# Altium PCB PDM.PcbDoc (part 3 of 4)
Units mm, origin at the board's own origin, x right, y up, seen from the top; angles counter-clockwise.
Board outline 150 x 150 mm, 2 copper layers (Top Layer, Bottom Layer), stack 1.58 mm thick; 183 components, 85 nets, 477 pads, 0 vias.
Unrouted connection lines stored in the file: 318.
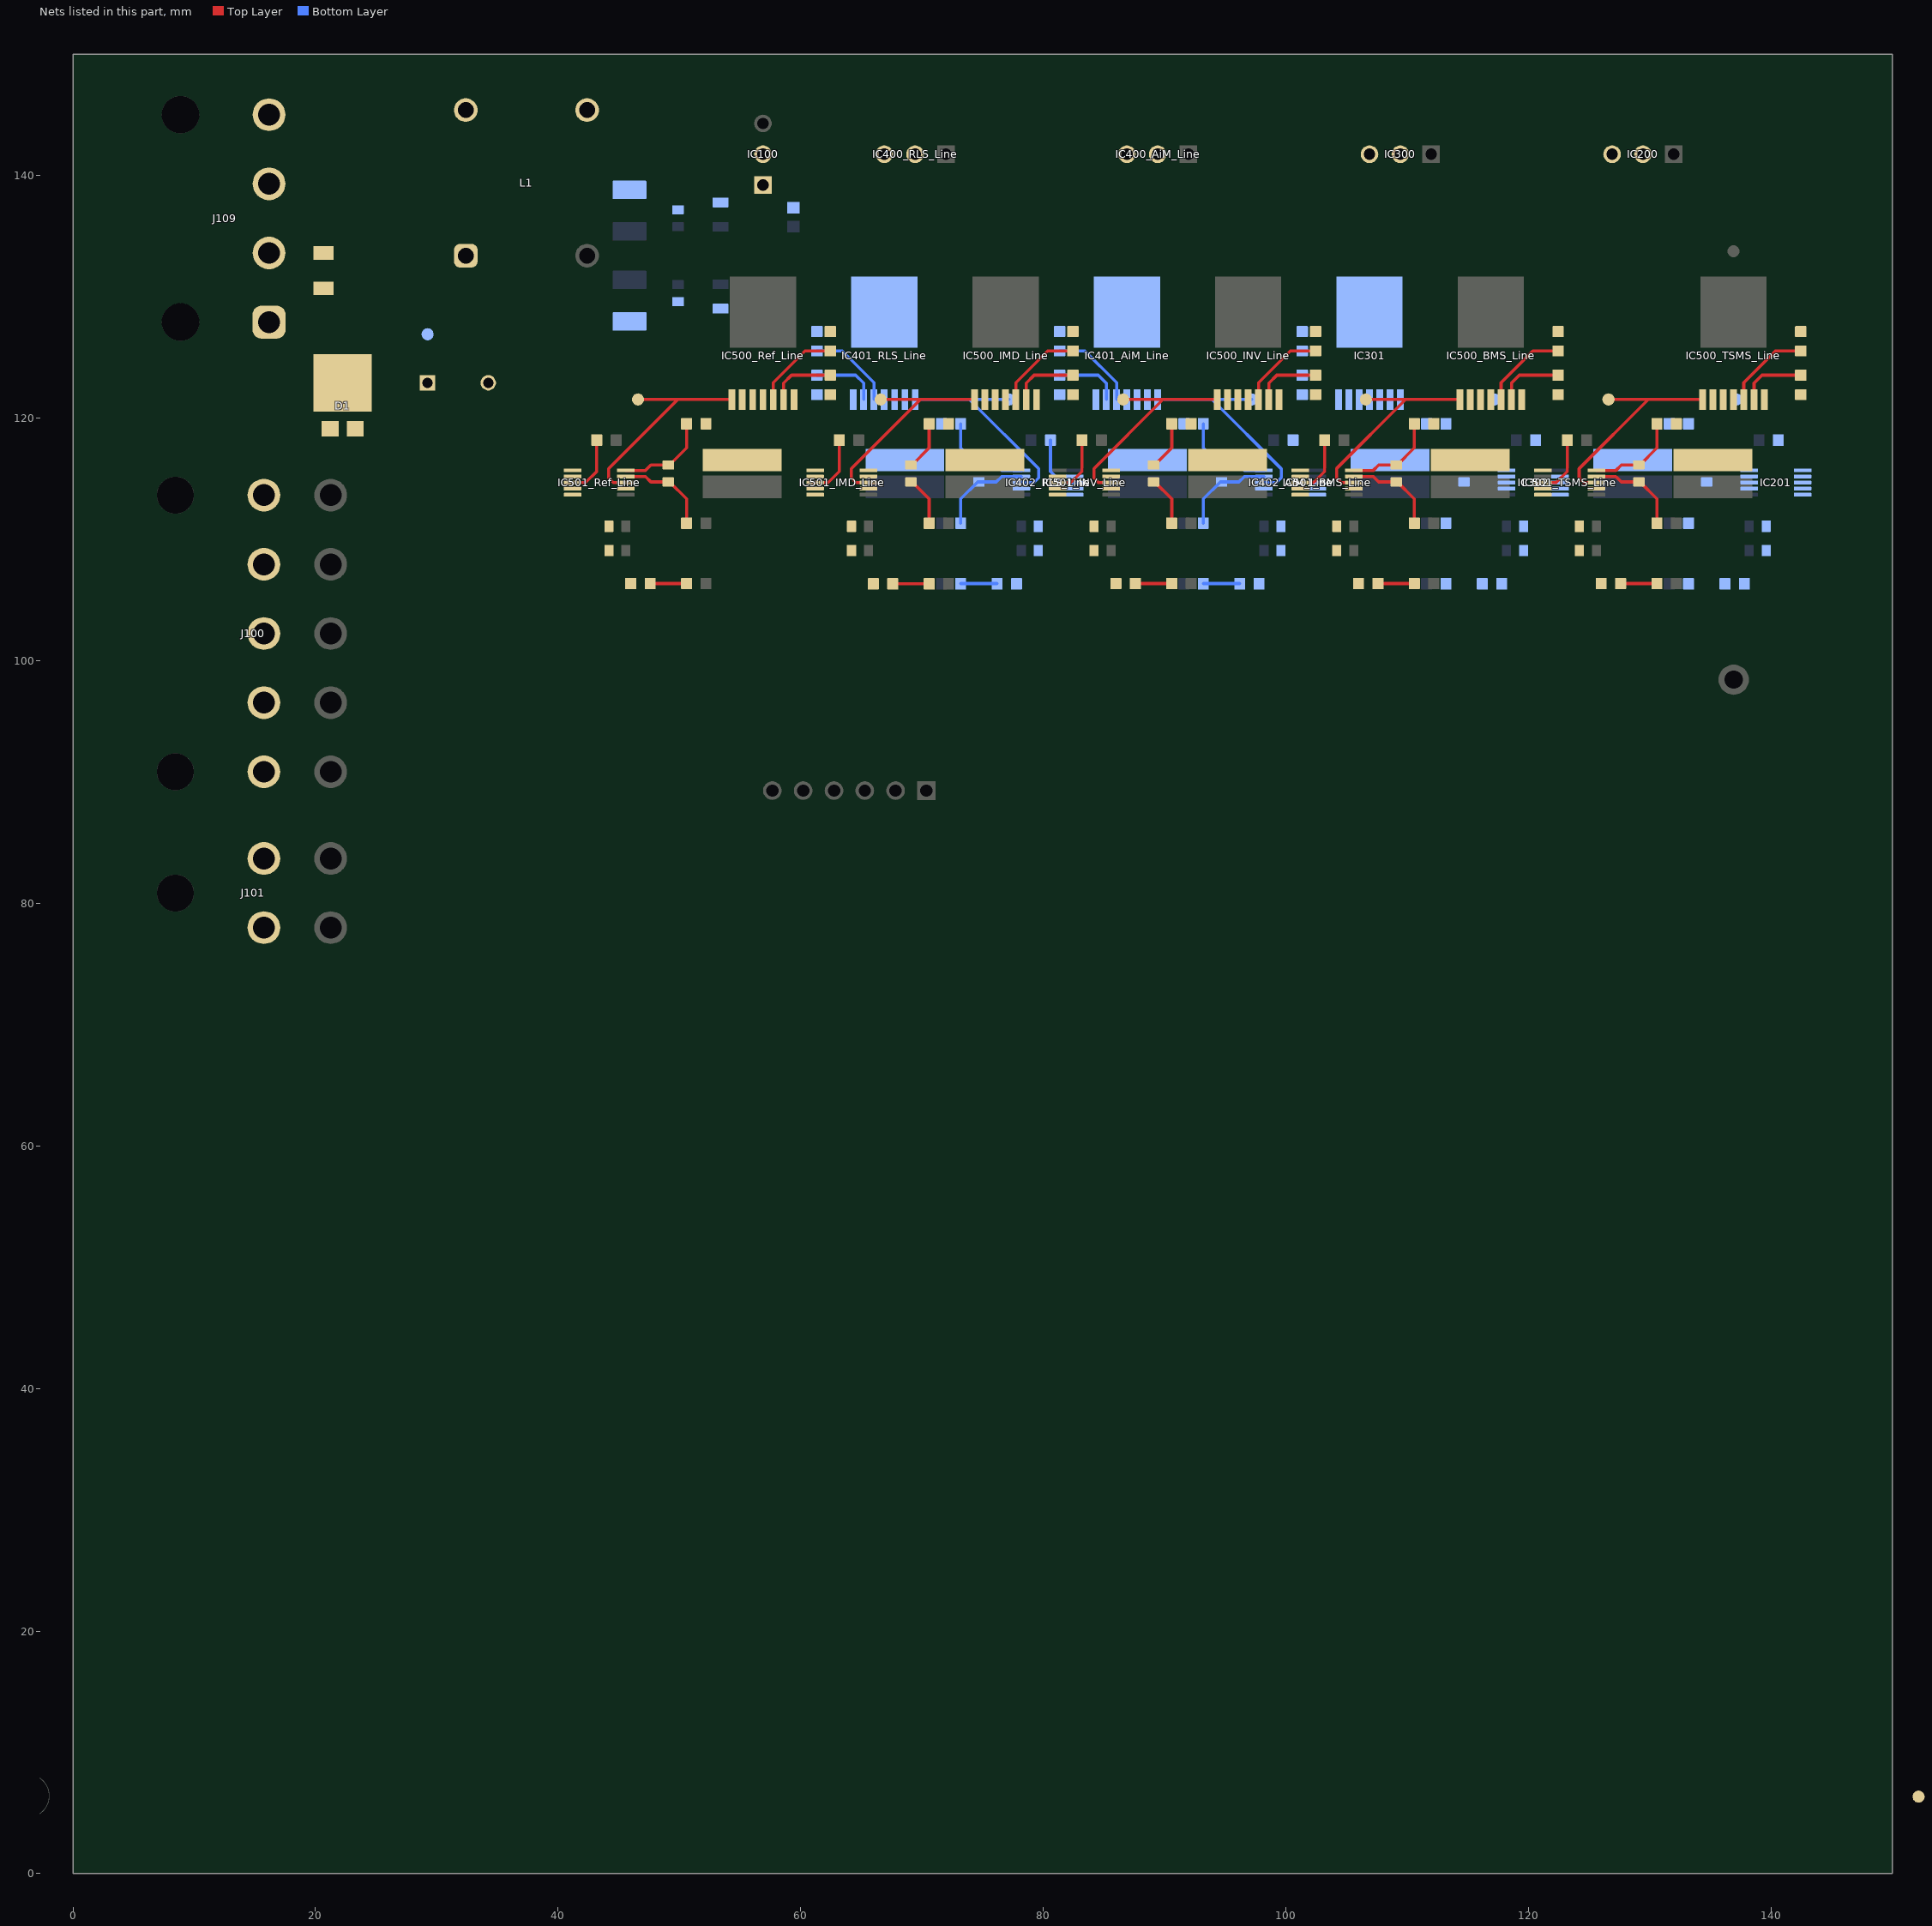
[diagram p2: the nets of this part, all layers, seen from the top]

## Nets (pads, with @x,y where several pads share a name; then routed paths per layer and width w, separated by ;. In a path a pad name is that pad's centre, name@x,y a point inside that pad or via, vN(x,y) a via of type N, cw(c..) or ccw(c..) an arc to the next point about the centre after c; other vN are vias at no path point) (continued)
GND: C1.2 C2.2 C3.2 C4.2 C5.2 C6.2 C201.1 C202.1 C301.1 C302.1 C401_AiM_Line.1 C401_RLS_Line.1 C402_AiM_Line.1 C402_RLS_Line.1 C501_BMS_Line.1 C501_IMD_Line.1 C501_INV_Line.1 C501_Ref_Line.1 C501_TSMS_Line.1 C502_BMS_Line.1 C502_IMD_Line.1 C502_INV_Line.1 C502_Ref_Line.1 C502_TSMS_Line.1 IC100.2 IC200.2 IC201.2 IC201.7 IC300.2 IC301.7 IC302.7 IC400_AiM_Line.2 IC400_RLS_Line.2 IC401_AiM_Line.7 IC401_RLS_Line.7 IC402_AiM_Line.7 IC402_RLS_Line.7 IC500_BMS_Line.7 IC500_IMD_Line.7 IC500_INV_Line.7 IC500_Ref_Line.7 IC500_TSMS_Line.7 IC501_BMS_Line.1 IC501_BMS_Line.7 IC501_IMD_Line.1 IC501_IMD_Line.7 IC501_INV_Line.2 IC501_INV_Line.7 IC501_Ref_Line.1 IC501_Ref_Line.2 IC501_Ref_Line.7 IC501_TSMS_Line.1 IC501_TSMS_Line.7 J100.1 J100.2 J100.3 J100.4 J100.5 J101.1 J101.2 J109.3 J109.4 J116.1 J116.4 L1.3 L100.C L200.C L300.C L400_AiM_Line.C L400_RLS_Line.C L500_BMS_Line.C L500_IMD_Line.C L500_INV_Line.C L500_Ref_Line.C L500_TSMS_Line.C R300.2 R301.2 R400_AiM_Line.2 R400_RLS_Line.2 R402_AiM_Line.2 R402_RLS_Line.2 R500_BMS_Line.2 R500_IMD_Line.2 R500_INV_Line.2 R500_Ref_Line.2 R500_TSMS_Line.2 R501_BMS_Line.2 R501_IMD_Line.2 R501_INV_Line.2 R501_Ref_Line.2 R501_TSMS_Line.2 TP102.1 TP103.1
IN+: F1.1 J109.2 TP115.1
IN-: C7.N D1.1 D1.2 J109.1 L1.4 TP116.1
NetC7_P: C7.P D1.3 F1.2 L1.1 TP1.1
NetC200_1: C200.1 IC201.10 R202.1
NetC200_2: C200.2 IC201.9 R203.1
NetC300_1: C300.1 IC302.10 R304.1
NetC300_2: C300.2 IC302.9 R305.1
NetC400_AiM_Line_1: C400_AiM_Line.1 IC402_AiM_Line.10 R403_AiM_Line.1 | length 7.7
  Bottom Layer w0.254: R403_AiM_Line.1@93.185,119.526 93.185,117.531 C400_AiM_Line.1@94.59,116.126 ; C400_AiM_Line.1@94.685,116.126 96.121,116.126 96.571,115.676 IC402_AiM_Line.10@98.185,115.676
NetC400_AiM_Line_2: C400_AiM_Line.2 IC402_AiM_Line.9 R404_AiM_Line.1 | length 7.7
  Bottom Layer w0.254: R404_AiM_Line.1@93.185,111.326 93.185,113.321 C400_AiM_Line.2@94.59,114.726 ; C400_AiM_Line.2@94.685,114.726 96.121,114.726 96.571,115.176 IC402_AiM_Line.9@98.185,115.176
NetC400_RLS_Line_1: C400_RLS_Line.1 IC402_RLS_Line.10 R403_RLS_Line.1 | length 7.8
  Bottom Layer w0.254: R403_RLS_Line.1@73.185,119.526 73.185,117.531 74.59,116.126 C400_RLS_Line.1@74.685,116.126 76.121,116.126 76.571,115.676 IC402_RLS_Line.10@78.185,115.676
NetC400_RLS_Line_2: C400_RLS_Line.2 IC402_RLS_Line.9 R404_RLS_Line.1 | length 7.8
  Bottom Layer w0.254: R404_RLS_Line.1@73.185,111.326 73.185,113.321 74.59,114.726 C400_RLS_Line.2@74.685,114.726 76.121,114.726 76.571,115.176 IC402_RLS_Line.9@78.185,115.176
NetC500_BMS_Line_1: C500_BMS_Line.1 IC501_BMS_Line.10 R504_BMS_Line.1 | length 7.7
  Top Layer w0.254: IC501_BMS_Line.10@105.585,115.676 107.198,115.676 107.648,116.126 C500_BMS_Line.1@109.085,116.126 ; C500_BMS_Line.1@109.18,116.126 110.585,117.531 R504_BMS_Line.1@110.585,119.526
NetC500_BMS_Line_2: C500_BMS_Line.2 IC501_BMS_Line.9 R505_BMS_Line.1 | length 7.7
  Top Layer w0.254: IC501_BMS_Line.9@105.585,115.176 107.198,115.176 107.648,114.726 C500_BMS_Line.2@109.085,114.726 ; C500_BMS_Line.2@109.18,114.726 110.585,113.321 R505_BMS_Line.1@110.585,111.326
NetC500_IMD_Line_1: C500_IMD_Line.1 IC501_IMD_Line.10 R504_IMD_Line.1 | length 4
  Top Layer w0.254: C500_IMD_Line.1@69.18,116.126 70.585,117.531 R504_IMD_Line.1@70.585,119.526
NetC500_IMD_Line_2: C500_IMD_Line.2 IC501_IMD_Line.9 R505_IMD_Line.1 | length 4
  Top Layer w0.254: C500_IMD_Line.2@69.18,114.726 70.585,113.321 R505_IMD_Line.1@70.585,111.326
NetC500_INV_Line_1: C500_INV_Line.1 IC501_INV_Line.10 R504_INV_Line.1 | length 4
  Top Layer w0.254: C500_INV_Line.1@89.18,116.126 90.585,117.531 R504_INV_Line.1@90.585,119.526
NetC500_INV_Line_2: C500_INV_Line.2 IC501_INV_Line.9 R505_INV_Line.1 | length 4
  Top Layer w0.254: C500_INV_Line.2@89.18,114.726 90.585,113.321 R505_INV_Line.1@90.585,111.326
NetC500_Ref_Line_1: C500_Ref_Line.1 IC501_Ref_Line.10 R504_Ref_Line.1 | length 7.8
  Top Layer w0.254: IC501_Ref_Line.10@45.585,115.676 47.198,115.676 47.648,116.126 C500_Ref_Line.1@49.085,116.126 49.18,116.126 50.585,117.531 R504_Ref_Line.1@50.585,119.526
NetC500_Ref_Line_2: C500_Ref_Line.2 IC501_Ref_Line.9 R505_Ref_Line.1 | length 7.8
  Top Layer w0.254: IC501_Ref_Line.9@45.585,115.176 47.198,115.176 47.648,114.726 C500_Ref_Line.2@49.085,114.726 49.18,114.726 50.585,113.321 R505_Ref_Line.1@50.585,111.326
NetC500_TSMS_Line_1: C500_TSMS_Line.1 IC501_TSMS_Line.10 R504_TSMS_Line.1 | length 7.7
  Top Layer w0.254: IC501_TSMS_Line.10@125.585,115.676 127.198,115.676 127.648,116.126 C500_TSMS_Line.1@129.085,116.126 ; C500_TSMS_Line.1@129.18,116.126 130.585,117.531 R504_TSMS_Line.1@130.585,119.526
NetC500_TSMS_Line_2: C500_TSMS_Line.2 IC501_TSMS_Line.9 R505_TSMS_Line.1 | length 7.7
  Top Layer w0.254: IC501_TSMS_Line.9@125.585,115.176 127.198,115.176 127.648,114.726 C500_TSMS_Line.2@129.085,114.726 ; C500_TSMS_Line.2@129.18,114.726 130.585,113.321 R505_TSMS_Line.1@130.585,111.326
NetF100_2: F100.2 IC100.1
NetIC200_3: IC200.3 IC201.8 R200.2 R202.2 TP200.1
NetIC201_3: IC201.3 R204.2
NetIC300_3: IC300.3 IC301.Tab TP300.1
NetIC301_1: IC301.1 IC301.2 IC301.3 IC302.8 R302.2 R304.2 TP301.1
NetIC301_4: IC301.4 IC302.3 R306.2
NetIC301_5: IC301.5 R300.1
NetIC301_6: IC301.6 R301.1
NetIC400_AiM_Line_3: IC400_AiM_Line.3 IC401_AiM_Line.Tab TP400_AiM_Line.1
NetIC400_RLS_Line_3: IC400_RLS_Line.3 IC401_RLS_Line.Tab TP400_RLS_Line.1
NetIC401_AiM_Line_1: IC401_AiM_Line.1 IC401_AiM_Line.2 IC401_AiM_Line.3 IC402_AiM_Line.8 R401_AiM_Line.2 R403_AiM_Line.2 TP401_AiM_Line.1 | length 18.2
  Bottom Layer w0.254: IC401_AiM_Line.1@89.435,121.526 93.896,121.526 ; 97.185,121.526 93.896,121.526 ; IC402_AiM_Line.8@98.185,114.676 99.226,114.676 99.605,115.055 99.605,115.817 93.896,121.526
NetIC401_AiM_Line_4: IC401_AiM_Line.4 IC402_AiM_Line.3 R406_AiM_Line.2
NetIC401_AiM_Line_5: IC401_AiM_Line.5 R400_AiM_Line.1 | length 7.2
  Bottom Layer w0.254: 81.335,125.526 83.419,125.526 86.035,122.91 IC401_AiM_Line.5@86.035,121.526
NetIC401_AiM_Line_6: IC401_AiM_Line.6 R402_AiM_Line.1 | length 5.5
  Bottom Layer w0.254: 81.335,123.526 84.529,123.526 85.185,122.871 IC401_AiM_Line.6@85.185,121.526
NetIC401_RLS_Line_1: IC401_RLS_Line.1 IC401_RLS_Line.2 IC401_RLS_Line.3 IC402_RLS_Line.8 R401_RLS_Line.2 R403_RLS_Line.2 TP401_RLS_Line.1 | length 18.2
  Bottom Layer w0.254: IC401_RLS_Line.1@69.435,121.526 73.896,121.526 ; 77.185,121.526 73.896,121.526 ; IC402_RLS_Line.8@78.185,114.676 79.226,114.676 79.605,115.055 79.605,115.817 73.896,121.526
NetIC401_RLS_Line_4: IC401_RLS_Line.4 IC402_RLS_Line.3 R406_RLS_Line.2 | length 5
  Bottom Layer w0.254: R406_RLS_Line.2@80.585,118.176 80.585,115.603 81.512,114.676 IC402_RLS_Line.3@82.585,114.676
NetIC401_RLS_Line_5: IC401_RLS_Line.5 R400_RLS_Line.1 | length 7.2
  Bottom Layer w0.254: 61.335,125.526 63.419,125.526 66.035,122.911 IC401_RLS_Line.5@66.035,121.526
NetIC401_RLS_Line_6: IC401_RLS_Line.6 R402_RLS_Line.1 | length 5.5
  Bottom Layer w0.254: 61.335,123.526 64.529,123.526 65.185,122.871 IC401_RLS_Line.6@65.185,121.526
NetIC500_BMS_Line_1: IC500_BMS_Line.1 IC500_BMS_Line.2 IC500_BMS_Line.3 IC501_BMS_Line.8 R502_BMS_Line.2 R504_BMS_Line.2 TP501_BMS_Line.1 | length 18.2
  Top Layer w0.254: IC501_BMS_Line.8@105.585,114.676 104.543,114.676 104.164,115.055 104.164,115.817 109.873,121.526 ; TP501_BMS_Line.1@106.585,121.526 109.873,121.526 ; IC500_BMS_Line.1@114.335,121.526 109.873,121.526
NetIC500_BMS_Line_4: IC500_BMS_Line.4 IC501_BMS_Line.3 R506_BMS_Line.1 | length 5
  Top Layer w0.254: IC501_BMS_Line.3@101.185,114.676 102.257,114.676 103.185,115.604 R506_BMS_Line.1@103.185,118.176
NetIC500_BMS_Line_5: IC500_BMS_Line.5 R500_BMS_Line.1 | length 7.2
  Top Layer w0.254: IC500_BMS_Line.5@117.735,121.526 117.735,122.911 120.35,125.526 R500_BMS_Line.1@122.435,125.526
NetIC500_BMS_Line_6: IC500_BMS_Line.6 R501_BMS_Line.1 | length 5.5
  Top Layer w0.254: IC500_BMS_Line.6@118.585,121.526 118.585,122.871 119.24,123.526 R501_BMS_Line.1@122.435,123.526
NetIC500_IMD_Line_1: IC500_IMD_Line.1 IC500_IMD_Line.2 IC500_IMD_Line.3 IC501_IMD_Line.8 R502_IMD_Line.2 R504_IMD_Line.2 TP501_IMD_Line.1 | length 18.2
  Top Layer w0.254: IC501_IMD_Line.8@65.585,114.676 64.543,114.676 64.164,115.055 64.164,115.817 69.873,121.526 ; TP501_IMD_Line.1@66.585,121.526 69.873,121.526 ; IC500_IMD_Line.1@74.335,121.526 69.873,121.526
NetIC500_IMD_Line_4: IC500_IMD_Line.4 IC501_IMD_Line.3 R506_IMD_Line.1 | length 5
  Top Layer w0.254: IC501_IMD_Line.3@61.185,114.676 62.257,114.676 63.185,115.604 R506_IMD_Line.1@63.185,118.176
NetIC500_IMD_Line_5: IC500_IMD_Line.5 R500_IMD_Line.1 | length 7.2
  Top Layer w0.254: IC500_IMD_Line.5@77.735,121.526 77.735,122.911 80.35,125.526 R500_IMD_Line.1@82.435,125.526
NetIC500_IMD_Line_6: IC500_IMD_Line.6 R501_IMD_Line.1 | length 5.5
  Top Layer w0.254: IC500_IMD_Line.6@78.585,121.526 78.585,122.871 79.24,123.526 R501_IMD_Line.1@82.435,123.526
NetIC500_INV_Line_1: IC500_INV_Line.1 IC500_INV_Line.2 IC500_INV_Line.3 IC501_INV_Line.8 R502_INV_Line.2 R504_INV_Line.2 TP501_INV_Line.1 | length 18.2
  Top Layer w0.254: IC501_INV_Line.8@85.585,114.676 84.543,114.676 84.164,115.055 84.164,115.817 89.873,121.526 ; TP501_INV_Line.1@86.585,121.526 89.873,121.526 ; IC500_INV_Line.1@94.335,121.526 89.873,121.526
NetIC500_INV_Line_4: IC500_INV_Line.4 IC501_INV_Line.3 R506_INV_Line.1 | length 5
  Top Layer w0.254: IC501_INV_Line.3@81.185,114.676 82.257,114.676 83.185,115.604 R506_INV_Line.1@83.185,118.176
NetIC500_INV_Line_5: IC500_INV_Line.5 R500_INV_Line.1 | length 7.2
  Top Layer w0.254: IC500_INV_Line.5@97.735,121.526 97.735,122.911 100.35,125.526 R500_INV_Line.1@102.435,125.526
NetIC500_INV_Line_6: IC500_INV_Line.6 R501_INV_Line.1 | length 5.5
  Top Layer w0.254: IC500_INV_Line.6@98.585,121.526 98.585,122.871 99.24,123.526 R501_INV_Line.1@102.435,123.526
NetIC500_Ref_Line_1: IC500_Ref_Line.1 IC500_Ref_Line.2 IC500_Ref_Line.3 IC501_Ref_Line.8 R502_Ref_Line.2 R504_Ref_Line.2 TP501_Ref_Line.1 | length 18.2
  Top Layer w0.254: IC501_Ref_Line.8@45.585,114.676 44.543,114.676 44.164,115.055 44.164,115.817 49.873,121.526 ; TP501_Ref_Line.1@46.585,121.526 49.873,121.526 ; IC500_Ref_Line.1@54.335,121.526 49.873,121.526
NetIC500_Ref_Line_4: IC500_Ref_Line.4 IC501_Ref_Line.3 R506_Ref_Line.1 | length 5
  Top Layer w0.254: IC501_Ref_Line.3@41.185,114.676 42.257,114.676 43.185,115.604 R506_Ref_Line.1@43.185,118.176
NetIC500_Ref_Line_5: IC500_Ref_Line.5 R500_Ref_Line.1 | length 7.2
  Top Layer w0.254: IC500_Ref_Line.5@57.735,121.526 57.735,122.911 60.35,125.526 R500_Ref_Line.1@62.435,125.526
NetIC500_Ref_Line_6: IC500_Ref_Line.6 R501_Ref_Line.1 | length 5.5
  Top Layer w0.254: IC500_Ref_Line.6@58.585,121.526 58.585,122.871 59.24,123.526 R501_Ref_Line.1@62.435,123.526
NetIC500_TSMS_Line_1: IC500_TSMS_Line.1 IC500_TSMS_Line.2 IC500_TSMS_Line.3 IC501_TSMS_Line.8 R502_TSMS_Line.2 R504_TSMS_Line.2 TP501_TSMS_Line.1 | length 18.2
  Top Layer w0.254: IC501_TSMS_Line.8@125.585,114.676 124.543,114.676 124.164,115.055 124.164,115.817 129.873,121.526 ; TP501_TSMS_Line.1@126.585,121.526 129.873,121.526 ; IC500_TSMS_Line.1@134.335,121.526 129.873,121.526
NetIC500_TSMS_Line_4: IC500_TSMS_Line.4 IC501_TSMS_Line.3 R506_TSMS_Line.1 | length 5
  Top Layer w0.254: IC501_TSMS_Line.3@121.185,114.676 122.257,114.676 123.185,115.604 R506_TSMS_Line.1@123.185,118.176
NetIC500_TSMS_Line_5: IC500_TSMS_Line.5 R500_TSMS_Line.1 | length 7.2
  Top Layer w0.254: IC500_TSMS_Line.5@137.735,121.526 137.735,122.911 140.35,125.526 R500_TSMS_Line.1@142.435,125.526
NetIC500_TSMS_Line_6: IC500_TSMS_Line.6 R501_TSMS_Line.1 | length 5.5
  Top Layer w0.254: IC500_TSMS_Line.6@138.585,121.526 138.585,122.871 139.24,123.526 R501_TSMS_Line.1@142.435,123.526
NetL100_A: L100.A R100.1
NetL200_A: L200.A R201.1
NetL300_A: L300.A R303.1
NetL400_AiM_Line_A: L400_AiM_Line.A R405_AiM_Line.1 | length 3
  Bottom Layer w0.254: R405_AiM_Line.1@93.185,106.35 L400_AiM_Line.A@96.185,106.35
NetL400_RLS_Line_A: L400_RLS_Line.A R405_RLS_Line.1 | length 3
  Bottom Layer w0.254: R405_RLS_Line.1@73.185,106.35 L400_RLS_Line.A@76.185,106.35
NetL500_BMS_Line_A: L500_BMS_Line.A R503_BMS_Line.1 | length 3
  Top Layer w0.254: L500_BMS_Line.A@107.585,106.35 R503_BMS_Line.1@110.585,106.35
NetL500_IMD_Line_A: L500_IMD_Line.A R503_IMD_Line.1 | length 3
  Top Layer w0.254: L500_IMD_Line.A@67.585,106.326 R503_IMD_Line.1@70.585,106.326
NetL500_INV_Line_A: L500_INV_Line.A R503_INV_Line.1 | length 3
  Top Layer w0.254: L500_INV_Line.A@87.585,106.35 R503_INV_Line.1@90.585,106.35
NetL500_Ref_Line_A: L500_Ref_Line.A R503_Ref_Line.1 | length 3
  Top Layer w0.254: L500_Ref_Line.A@47.585,106.35 R503_Ref_Line.1@50.585,106.35
NetL500_TSMS_Line_A: L500_TSMS_Line.A R503_TSMS_Line.1 | length 3
  Top Layer w0.254: L500_TSMS_Line.A@127.585,106.35 R503_TSMS_Line.1@130.585,106.35
NetR101_2: R101.2 R103.2
NetR102_2: R102.2 R104.2
SCL: IC201.5 IC302.2 IC302.5 IC402_AiM_Line.5 IC402_RLS_Line.5 IC501_BMS_Line.2 IC501_BMS_Line.5 IC501_IMD_Line.5 IC501_INV_Line.5 IC501_Ref_Line.5 IC501_TSMS_Line.5 J113.1 J116.5 R104.1 TP106.1
SDA: IC201.1 IC201.4 IC302.4 IC402_AiM_Line.4 IC402_RLS_Line.2 IC402_RLS_Line.4 IC501_BMS_Line.4 IC501_IMD_Line.2 IC501_IMD_Line.4 IC501_INV_Line.4 IC501_Ref_Line.4 IC501_TSMS_Line.4 J113.2 J116.6 R103.1 TP104.1
pads on no net: H100.1 H101.1 H102.1 H103.1 J100. J101. J109.5 J109.6 J117.1 J117.2 J117.3 J117.4 J117.5 J117.6

## Keep-outs
Keep-Out Layer:
  the board outline again, w0.254

## Silkscreen, mask and mechanical layers (free items; w line width, h text height)
Mechanical 1:
  the board outline again, w0.254
Mechanical 17:
  circle w0.013: c217.936,172.461 r1.45
  circle w0.013: c217.936,191.461 r1.45
  circle w0.013: c217.936,172.461 r1.25
  circle w0.013: c207.936,181.961 r9
  circle w0.013: c207.936,181.961 r8
  circle w0.013: c217.936,191.461 r1.25
  circle w0.006: c207.936,96.961 r0.003
  circle w0.013: c217.936,172.461 r1.45
  circle w0.013: c217.936,191.461 r1.45
  circle w0.013: c217.936,172.461 r1.25
  circle w0.013: c207.936,181.961 r9
  circle w0.013: c207.936,181.961 r8
  circle w0.013: c217.936,191.461 r1.25
  circle w0.006: c207.936,96.961 r0.003
  lines w0.013: 203.936,163.761 203.936,173.899 203.936,163.761 ; 203.936,163.761 203.936,165.761 ; 203.936,163.761 225.636,163.761 ; 203.936,163.761 203.936,165.761 ; 203.936,163.761 225.636,163.761 ; 203.936,165.761 223.636,165.761 ; 203.936,165.761 223.636,165.761 ; 203.936,198.161 203.936,200.161 ; 203.936,198.161 223.636,198.161 ; 203.936,198.161 203.936,190.024 203.936,198.161 ; 203.936,198.161 203.936,200.161 ; 203.936,198.161 223.636,198.161 ; 203.936,200.161 225.636,200.161 ; 203.936,200.161 225.636,200.161 ; 223.636,165.761 223.636,198.161 ; 223.636,165.761 223.636,198.161 ; 225.636,163.761 225.636,200.161 ; 225.636,163.761 225.636,200.161
Mechanical 18:
  circle w0.013: c207.936,145.961 r4
  circle w0.013: c158.936,145.961 r4
  circle w0.013: c158.936,47.961 r4
  circle w0.006: c207.936,96.961 r0.003
  circle w0.013: c207.936,145.961 r4
  circle w0.013: c158.936,145.961 r4
  circle w0.013: c158.936,47.961 r4
  circle w0.006: c207.936,96.961 r0.003
Mechanical 19:
  circle w0.013: c207.936,145.961 r2.2
  circle w0.013: c158.936,47.961 r4
  circle w0.013: c207.936,145.961 r4
  circle w0.013: c158.936,145.961 r4
  circle w0.006: c207.936,96.961 r0.003
  circle w0.013: c207.936,145.961 r2.2
  circle w0.013: c158.936,47.961 r4
  circle w0.013: c207.936,145.961 r4
  circle w0.013: c158.936,145.961 r4
  circle w0.006: c207.936,96.961 r0.003
Mechanical 21:
  circle w0.013: c207.936,208.161 r4
  circle w0.013: c207.936,208.161 r2.2
  circle w0.013: c158.936,145.961 r4
  circle w0.013: c158.936,47.961 r4
  circle w0.006: c207.936,96.961 r0.003
  circle w0.013: c207.936,208.161 r4
  circle w0.013: c207.936,208.161 r2.2
  circle w0.013: c158.936,145.961 r4
  circle w0.013: c158.936,47.961 r4
  circle w0.006: c207.936,96.961 r0.003
Mechanical 22:
  circle w0.013: c207.936,145.961 r4
  circle w0.013: c207.936,145.961 r2.2
  circle w0.013: c207.936,145.961 r4
  circle w0.013: c207.936,208.161 r4
  circle w0.013: c207.936,208.161 r2.2
  circle w0.013: c207.936,208.161 r4
  circle w0.006: c207.936,96.961 r0.003
  circle w0.013: c207.936,145.961 r4
  circle w0.013: c207.936,145.961 r2.2
  circle w0.013: c207.936,145.961 r4
  circle w0.013: c207.936,208.161 r4
  circle w0.013: c207.936,208.161 r2.2
  circle w0.013: c207.936,208.161 r4
  circle w0.006: c207.936,96.961 r0.003
  lines w0.013: 203.936,163.761 225.636,163.761 ; 203.936,163.761 203.936,145.961 203.936,163.761 ; 203.936,163.761 203.936,165.761 ; 203.936,163.761 225.636,163.761 ; 203.936,163.761 203.936,165.761 ; 203.936,165.761 223.636,165.761 ; 203.936,165.761 223.636,165.761 ; 203.936,198.161 223.636,198.161 ; 203.936,198.161 203.936,200.161 ; 203.936,198.161 223.636,198.161 ; 203.936,198.161 203.936,200.161 ; 203.936,200.161 225.636,200.161 ; 203.936,200.161 203.936,208.161 203.936,200.161 ; 203.936,200.161 225.636,200.161 ; 223.636,165.761 223.636,198.161 ; 223.636,165.761 223.636,198.161 ; 225.636,163.761 225.636,200.161 ; 225.636,163.761 225.636,200.161 ; 211.936,145.961 211.936,163.761 211.936,145.961 ; 211.936,200.161 211.936,208.161 211.936,200.161
Mechanical 23:
  circle w0.013: c158.936,47.961 r4
  circle w0.013: c158.936,145.961 r4
  circle w0.013: c256.936,96.961 r2.2
  circle w0.013: c256.936,145.961 r2.2
  circle w0.006: c270.936,80.061 r0.003
  circle w0.006: c207.936,96.961 r0.003
  circle w0.006: c287.936,153.961 r0.003
  circle w0.013: c158.936,47.961 r4
  circle w0.013: c158.936,145.961 r4
  circle w0.013: c256.936,96.961 r2.2
  circle w0.013: c256.936,145.961 r2.2
  circle w0.006: c270.936,80.061 r0.003
  circle w0.006: c207.936,96.961 r0.003
  circle w0.006: c287.936,153.961 r0.003
  lines w0.013: 246.423,82.061 288.936,82.061 ; 246.423,82.061 246.423,151.961 ; 246.423,82.061 288.936,82.061 ; 246.423,82.061 246.423,151.961 ; 246.423,151.961 288.936,151.961 ; 246.423,151.961 288.936,151.961 ; 288.936,82.061 288.936,151.961 ; 288.936,82.061 288.936,151.961 ; 290.936,-22.039 290.936,215.961 290.936,-22.039
Mechanical 24:
  circle w0.013: c158.936,145.961 r4
  circle w0.013: c158.936,47.961 r4
  circle w0.013: c256.936,96.961 r4
  circle w0.006: c207.936,96.961 r0.003
  circle w0.013: c158.936,145.961 r4
  circle w0.013: c158.936,47.961 r4
  circle w0.013: c256.936,96.961 r4
  circle w0.006: c207.936,96.961 r0.003
Mechanical 25:
  circle w0.013: c256.936,96.961 r2
  circle w0.013: c256.936,145.961 r2
  circle w0.006: c207.936,96.961 r0.003
  circle w0.013: c256.936,96.961 r2
  circle w0.013: c256.936,145.961 r2
  circle w0.006: c207.936,96.961 r0.003
  lines w0.013: 209.35,96.961 254.905,51.407 ; 209.35,96.961 254.905,142.516 ; 209.35,96.961 254.905,51.407 ; 209.35,96.961 254.905,142.516 ; 254.905,51.407 ccw(c256.936,47.961) 255.936,51.834 ; 254.905,51.407 ccw(c256.936,47.961) 255.936,51.834 ; 254.905,142.516 cw(c256.936,145.961) 255.936,142.088 ; 254.905,142.516 cw(c256.936,145.961) 255.936,142.088 ; 255.936,51.834 255.936,93.088 ; 255.936,51.834 255.936,93.088 ; 255.936,93.088 ccw(c256.936,96.961) 255.936,100.834 ; 255.936,93.088 ccw(c256.936,96.961) 255.936,100.834 ; 255.936,100.834 255.936,142.088 ; 255.936,100.834 255.936,142.088
Mechanical 26:
  circle w0.013: c158.936,96.961 r2.2
  circle w0.013: c256.936,96.961 r2
  circle w0.013: c256.936,145.961 r2
  circle w0.006: c207.936,96.961 r0.003
  circle w0.013: c158.936,96.961 r2.2
  circle w0.013: c256.936,96.961 r2
  circle w0.013: c256.936,145.961 r2
  circle w0.006: c207.936,96.961 r0.003
  lines w0.013: 126.936,69.692 169.45,69.692 ; 126.936,69.692 126.936,139.961 ; 126.936,69.692 169.45,69.692 ; 126.936,69.692 126.936,139.961 ; 126.936,139.961 169.45,139.961 ; 126.936,139.961 169.45,139.961 ; 169.45,69.692 169.45,139.961 ; 169.45,69.692 169.45,139.961 ; 209.35,96.961 254.905,51.407 ; 209.35,96.961 254.905,142.516 ; 209.35,96.961 254.905,51.407 ; 209.35,96.961 254.905,142.516 ; 254.905,51.407 ccw(c256.936,47.961) 255.936,51.834 ; 254.905,51.407 ccw(c256.936,47.961) 255.936,51.834 ; 254.905,142.516 cw(c256.936,145.961) 255.936,142.088 ; 254.905,142.516 cw(c256.936,145.961) 255.936,142.088 ; 255.936,51.834 255.936,93.088 ; 255.936,51.834 255.936,93.088 ; 255.936,93.088 ccw(c256.936,96.961) 255.936,100.834 ; 255.936,93.088 ccw(c256.936,96.961) 255.936,100.834 ; 255.936,100.834 255.936,142.088 ; 255.936,100.834 255.936,142.088 ; 124.936,67.692 141.936,67.692 124.936,67.692 ; 154.941,145.762 ccw(c158.936,145.961) 162.936,145.961 cw(c158.936,145.961) 154.941,145.762
Mechanical 27:
  circle w0.013: c256.936,145.961 r2
  circle w0.013: c158.936,96.961 r4
  circle w0.013: c256.936,96.961 r2
  circle w0.006: c207.936,96.961 r0.003
  circle w0.013: c256.936,145.961 r2
  circle w0.013: c158.936,96.961 r4
  circle w0.013: c256.936,96.961 r2
  circle w0.006: c207.936,96.961 r0.003
  lines w0.013: 209.35,96.961 254.905,51.407 ; 209.35,96.961 254.905,142.516 ; 209.35,96.961 254.905,51.407 ; 209.35,96.961 254.905,142.516 ; 254.905,51.407 ccw(c256.936,47.961) 255.936,51.834 ; 254.905,51.407 ccw(c256.936,47.961) 255.936,51.834 ; 254.905,142.516 cw(c256.936,145.961) 255.936,142.088 ; 254.905,142.516 cw(c256.936,145.961) 255.936,142.088 ; 255.936,51.834 255.936,93.088 ; 255.936,51.834 255.936,93.088 ; 255.936,93.088 ccw(c256.936,96.961) 255.936,100.834 ; 255.936,93.088 ccw(c256.936,96.961) 255.936,100.834 ; 255.936,100.834 255.936,142.088 ; 255.936,100.834 255.936,142.088
Mechanical 28:
  circle w0.013: c256.936,145.961 r2
  circle w0.013: c256.936,96.961 r2
  circle w0.013: c158.936,96.961 r2
  circle w0.006: c207.936,96.961 r0.003
  circle w0.013: c256.936,145.961 r2
  circle w0.013: c256.936,96.961 r2
  circle w0.013: c158.936,96.961 r2
  circle w0.006: c207.936,96.961 r0.003
  lines w0.013: 209.35,96.961 254.905,51.407 ; 209.35,96.961 254.905,142.516 ; 209.35,96.961 254.905,51.407 ; 209.35,96.961 254.905,142.516 ; 254.905,51.407 ccw(c256.936,47.961) 255.936,51.834 ; 254.905,51.407 ccw(c256.936,47.961) 255.936,51.834 ; 254.905,142.516 cw(c256.936,145.961) 255.936,142.088 ; 254.905,142.516 cw(c256.936,145.961) 255.936,142.088 ; 255.936,51.834 255.936,93.088 ; 255.936,51.834 255.936,93.088 ; 255.936,93.088 ccw(c256.936,96.961) 255.936,100.834 ; 255.936,93.088 ccw(c256.936,96.961) 255.936,100.834 ; 255.936,100.834 255.936,142.088 ; 255.936,100.834 255.936,142.088
Mechanical 29:
  circle w0.006: c153.936,96.961 r0.003
  circle w0.006: c153.936,96.961 r0.003
  lines w0.013: 153.936,151.861 153.936,168.97 153.936,151.861 ; 153.936,151.861 153.936,165.961 ; 153.936,151.861 153.936,165.961 ; 153.936,165.894 153.936,165.861 153.936,165.894 ; 153.936,165.894 153.936,165.961 ; 153.936,165.894 153.936,165.961 ; 153.936,165.961 153.936,167.861 153.936,165.961 ; 153.936,194.061 153.936,192.061 153.936,194.061 ; 153.936,194.061 153.936,197.461 ; 153.936,194.061 153.936,197.461 ; 153.936,197.461 153.936,195.758 153.936,197.461 ; 138.139,183.553 cw(c153.936,179.961) 170.036,181.759 ccw(c153.936,179.961) 138.139,183.553 ; 139.836,181.644 cw(c153.936,179.961) 168.036,181.644 ccw(c153.936,179.961) 139.836,181.644 ; 141.836,179.961 cw(c153.936,179.961) 166.036,179.961 ccw(c153.936,179.961) 141.836,179.961 ; 153.936,145.762 153.936,162.861 153.936,145.762 ; 153.936,197.061 153.936,202.449 153.936,197.061
Mechanical 30:
  circle w0.006: c203.936,96.961 r0.003
  circle w0.006: c203.936,96.961 r0.003
  lines w0.013: 203.936,145.961 203.936,165.761 ; 203.936,145.961 203.936,161.761 203.936,145.961 ; 203.936,145.961 203.936,165.761 ; 203.936,163.761 203.936,151.761 203.936,163.761 ; 203.936,163.761 203.936,173.899 ; 203.936,163.761 203.936,173.899 ; 203.936,165.761 203.936,173.899 ; 203.936,165.761 203.936,173.899 ; 203.936,190.024 203.936,198.161 ; 203.936,190.024 203.936,200.161 ; 203.936,190.024 203.936,198.161 ; 203.936,190.024 203.936,200.161 ; 203.936,198.161 203.936,208.161 ; 203.936,198.161 203.936,208.161 ; 203.936,200.161 ccw(c203.936,202.161) 205.936,202.161 cw(c203.936,202.161) 203.936,200.161 ; 203.936,200.161 203.936,203.161 203.936,200.161 ; 203.936,208.161 203.936,202.161 203.936,208.161 ; 201.936,161.761 ccw(c203.936,161.761) 203.936,159.761 cw(c203.936,161.761) 201.936,161.761
Mechanical 31:
  circle w0.006: c207.936,96.961 r0.003
  circle w0.006: c207.936,96.961 r0.003
  lines w0.013: 199.436,83.461 216.436,110.461 ; 199.436,110.461 216.436,83.461 ; 199.436,85.061 ccw(c201.036,85.061) 201.036,83.461 214.836,83.461 ccw(c214.836,85.061) 216.436,85.061 216.436,108.861 ccw(c214.836,108.861) 214.836,110.461 201.036,110.461 ccw(c201.036,108.861) 199.436,108.861 199.436,85.061
Mechanical 32:
  circle w0.006: c207.936,96.961 r0.003
  lines w0.013: 199.436,85.061 ccw(c201.036,85.061) 201.036,83.461 214.836,83.461 ccw(c214.836,85.061) 216.436,85.061 216.436,108.861 ccw(c214.836,108.861) 214.836,110.461 201.036,110.461 ccw(c201.036,108.861) 199.436,108.861 199.436,85.061 ; 199.671,85.061 ccw(c201.036,85.061) 201.036,83.696 214.836,83.696 ccw(c214.836,85.061) 216.201,85.061 216.201,108.861 ccw(c214.836,108.861) 214.836,110.226 201.036,110.226 ccw(c201.036,108.861) 199.671,108.861 199.671,85.061 ; 199.906,85.061 ccw(c201.036,85.061) 201.036,83.931 214.836,83.931 ccw(c214.836,85.061) 215.966,85.061 215.966,108.861 ccw(c214.836,108.861) 214.836,109.991 201.036,109.991 ccw(c201.036,108.861) 199.906,108.861 199.906,85.061
Mechanical 33:
  circle w0.013: c207.936,96.961 r4.1
  circle w0.006: c207.936,96.961 r0.003
  lines w0.013: 199.436,85.061 ccw(c201.036,85.061) 201.036,83.461 214.836,83.461 ccw(c214.836,85.061) 216.436,85.061 216.436,108.861 ccw(c214.836,108.861) 214.836,110.461 201.036,110.461 ccw(c201.036,108.861) 199.436,108.861 199.436,85.061
Mechanical 34:
  circle w0.013: c207.936,105.461 r3
  circle w0.013: c207.936,96.961 r4.1
  circle w0.006: c207.936,96.961 r0.003
  lines w0.013: 207.936,96.961 207.936,105.461 ; 199.636,85.061 ccw(c201.036,85.061) 201.036,83.661 214.836,83.661 ccw(c214.836,85.061) 216.236,85.061 216.236,108.861 ccw(c214.836,108.861) 214.836,110.261 201.036,110.261 ccw(c201.036,108.861) 199.636,108.861 199.636,85.061
Mechanical 35:
  circle w0.013: c207.936,96.961 r8.5
  circle w0.013: c207.936,96.961 r4.3
  circle w0.013: c207.936,105.461 r3.2
  circle w0.013: c207.936,96.961 r10.7
  circle w0.013: c207.936,96.961 r6.3
  circle w0.013: c207.936,96.961 r8.7
  circle w0.013: c207.936,96.961 r6.5
  circle w0.013: c207.936,96.961 r13.1
  circle w0.013: c207.936,96.961 r12.9
  circle w0.013: c207.936,96.961 r10.9
  circle w0.013: c207.936,96.961 r4.1
  circle w0.013: c207.936,105.461 r3
  circle w0.006: c207.936,96.961 r0.003
  lines w0.013: 199.636,85.061 ccw(c201.036,85.061) 201.036,83.661 214.836,83.661 ccw(c214.836,85.061) 216.236,85.061 216.236,108.861 ccw(c214.836,108.861) 214.836,110.261 201.036,110.261 ccw(c201.036,108.861) 199.636,108.861 199.636,85.061
Mechanical 36:
  circle w0.013: c215.366,84.531 r0.6
  circle w0.013: c200.506,84.531 r0.6
  circle w0.013: c200.506,109.391 r0.6
  circle w0.013: c215.366,109.391 r0.6
  circle w0.013: c207.936,105.461 r3
  circle w0.013: c207.936,96.961 r4.3
  circle w0.013: c207.936,96.961 r4.1
  circle w0.013: c207.936,105.461 r3.2
  circle w0.006: c207.936,96.961 r0.003
  circle w0.006: c207.936,105.461 r0.003
  circle w0.006: c207.936,96.961 r0.003
  circle w0.006: c207.936,96.961 r0.003
  lines w0.013: 199.906,90.625 204.525,94.343 ; 199.906,96.733 207.836,90.368 ; 199.906,97.206 205.654,103.219 ; 199.906,105.217 204.893,100 ; 200.043,97.06 205.798,103.08 ; 200.043,105.363 205.038,100.138 ; 200.064,96.863 207.836,90.625 ; 200.066,90.496 204.65,94.188 ; 200.168,109.584 205.08,106.905 ; 200.17,84.336 207.675,90.296 ; 200.237,84.262 207.836,90.296 ; 200.312,84.194 207.836,90.169 ; 200.315,109.732 205.176,107.081 ; 207.936,63.494 207.936,96.961 ; 208.036,90.169 215.561,84.194 ; 208.036,90.368 215.966,96.733 ; 208.036,90.496 215.966,96.861 ; 208.036,90.625 215.809,96.863 ; 208.197,90.296 215.703,84.336 ; 210.074,103.08 215.83,97.06 ; 210.219,103.219 215.966,97.206 ; 210.696,107.081 215.557,109.732 ; 210.792,106.905 215.705,109.584 ; 210.834,100.138 215.83,105.363 ; 210.979,100 215.966,105.217 ; 211.222,94.188 215.807,90.496 ; 211.347,94.343 215.966,90.625 ; 215.635,109.66 207.936,105.461 199.906,97.061 ; 199.906,90.496 207.936,96.961 ; 199.906,90.496 215.966,90.496 215.966,90.296 199.906,90.296 199.906,90.496 ; 199.906,96.861 215.966,97.061 ; 199.906,96.861 199.906,97.061 ; 199.906,96.861 215.966,96.861 ; 199.906,97.061 215.966,97.061 ; 199.906,97.061 215.966,96.861 ; 199.906,105.361 207.936,96.961 ; 199.906,105.361 215.966,105.561 ; 199.906,105.361 199.906,105.561 ; 199.906,105.361 215.966,105.361 ; 199.906,105.561 215.966,105.361 ; 199.906,105.561 215.966,105.561 ; 207.836,83.931 208.036,109.991 ; 207.836,83.931 207.836,109.991 ; 207.836,83.931 208.036,83.931 ; 207.836,109.991 208.036,83.931 ; 207.836,109.991 208.036,109.991 ; 208.036,83.931 208.036,109.991 ; 215.966,96.861 215.966,97.061 ; 215.966,105.361 215.966,105.561 ; 199.906,85.061 ccw(c201.036,85.061) 201.036,83.931 214.836,83.931 ccw(c214.836,85.061) 215.966,85.061 215.966,108.861 ccw(c214.836,108.861) 214.836,109.991 201.036,109.991 ccw(c201.036,108.861) 199.906,108.861 199.906,85.061
Mechanical 37:
  circle w0.013: c207.936,96.961 r4.1
  circle w0.013: c207.936,105.461 r3
  circle w0.006: c200.506,84.531 r0.003
  circle w0.006: c215.366,109.391 r0.003
  circle w0.006: c200.506,109.391 r0.003
  circle w0.006: c207.936,96.961 r0.003
  circle w0.006: c215.366,84.531 r0.003
  lines w0.013: 199.671,85.061 ccw(c201.036,85.061) 201.036,83.696 214.836,83.696 ccw(c214.836,85.061) 216.201,85.061 216.201,108.861 ccw(c214.836,108.861) 214.836,110.226 201.036,110.226 ccw(c201.036,108.861) 199.671,108.861 199.671,85.061 ; 199.906,85.061 ccw(c201.036,85.061) 199.949,84.754 cw(c200.506,84.531) 200.939,84.947 207.675,90.296 199.906,90.296 199.906,85.061 ; 199.906,90.625 199.906,96.861 203.637,96.861 ccw(c207.936,96.961) 204.525,94.343 199.906,90.625 ; 199.906,97.061 203.637,97.061 cw(c207.936,96.961) 204.893,100 199.906,105.217 199.906,97.061 ; 199.906,105.561 204.738,105.561 cw(c207.936,105.461) 207.836,108.66 207.836,109.991 201.036,109.991 ccw(c201.036,108.861) 200.729,109.949 cw(c200.506,109.391) 199.949,109.169 ccw(c201.036,108.861) 199.906,108.861 199.906,105.561 ; 200.045,105.361 204.738,105.361 ccw(c207.936,105.461) 207.836,102.263 207.836,101.26 ccw(c207.936,96.961) 205.038,100.138 200.045,105.361 ; 200.066,90.496 207.836,90.496 207.836,92.663 cw(c207.936,96.961) 204.65,94.188 200.066,90.496 ; 200.729,83.974 ccw(c201.036,85.061) 201.036,83.931 207.836,83.931 207.836,90.169 201.052,84.781 cw(c200.506,84.531) 200.729,83.974 ; 208.036,83.931 214.836,83.931 ccw(c214.836,85.061) 215.144,83.974 cw(c215.366,84.531) 214.821,84.781 208.036,90.169 208.036,83.931 ; 208.036,90.496 215.807,90.496 211.222,94.188 cw(c207.936,96.961) 208.036,92.663 208.036,90.496 ; 208.036,101.26 cw(c207.936,96.961) 210.834,100.138 215.828,105.361 211.135,105.361 cw(c207.936,105.461) 208.036,102.263 208.036,101.26 ; 208.036,108.66 cw(c207.936,105.461) 211.135,105.561 215.966,105.561 215.966,108.861 ccw(c214.836,108.861) 215.924,109.169 cw(c215.366,109.391) 215.144,109.949 ccw(c214.836,108.861) 214.836,109.991 208.036,109.991 208.036,108.66 ; 208.197,90.296 214.934,84.947 cw(c215.366,84.531) 215.924,84.754 ccw(c214.836,85.061) 215.966,85.061 215.966,90.296 208.197,90.296 ; 210.979,100 cw(c207.936,96.961) 212.235,97.061 215.966,97.061 215.966,105.217 210.979,100 ; 211.347,94.343 ccw(c207.936,96.961) 212.235,96.861 215.966,96.861 215.966,90.625 211.347,94.343
Mechanical 38:
  circle w0.006: c207.936,96.961 r0.003
  circle w0.006: c207.936,96.961 r0.003
  lines w0.013: 199.436,83.461 199.436,110.461 ; 199.436,83.461 216.436,83.461 ; 199.436,83.461 216.436,110.461 ; 199.436,110.461 216.436,83.461 ; 199.436,110.461 216.436,110.461 ; 216.436,83.461 216.436,110.461
Mechanical 39:
  circle w0.013: c207.936,96.961 r4.75
  circle w0.006: c207.936,96.961 r0.003
  lines w0.013: 199.436,83.461 199.436,110.461 216.436,110.461 216.436,83.461 199.436,83.461
Mechanical 40:
  circle w0.006: c207.936,96.961 r0.003
  lines w0.013: 199.436,93.496 216.436,93.496 ; 201.436,93.496 201.436,87.061 ccw(c203.036,87.061) 203.036,85.461 212.836,85.461 ccw(c212.836,87.061) 214.436,87.061 214.436,93.496 ; 199.436,85.061 ccw(c201.036,85.061) 201.036,83.461 214.836,83.461 ccw(c214.836,85.061) 216.436,85.061 216.436,108.861 ccw(c214.836,108.861) 214.836,110.461 201.036,110.461 ccw(c201.036,108.861) 199.436,108.861 199.436,85.061
Mechanical 41:
  circle w0.006: c207.936,96.961 r0.003
  lines w0.013: 201.836,110.161 214.036,110.161 ; 203.836,85.761 212.036,85.761 ; 214.836,110.461 201.036,110.461 ccw(c201.036,108.861) 199.436,108.861 199.436,95.271 201.436,95.271 201.436,87.061 ccw(c203.036,87.061) 203.036,85.461 212.836,85.461 ccw(c212.836,87.061) 214.436,87.061 214.436,95.271 216.436,95.271 216.436,108.861 ; 201.836,108.661 201.836,110.461 203.036,110.461 203.036,108.661 201.836,108.661 ; 203.836,85.461 203.836,87.261 205.036,87.261 205.036,85.461 203.836,85.461 ; 207.336,108.661 208.536,108.661 208.536,110.461 207.336,110.461 207.336,108.661 ; 210.836,85.461 210.836,87.261 212.036,87.261 212.036,85.461 210.836,85.461 ; 212.836,108.661 212.836,110.461 214.036,110.461 214.036,108.661 212.836,108.661
Mechanical 42:
  circle w0.006: c207.936,96.961 r0.003
  lines w0.013: 200.536,82.961 215.336,82.961 ; 203.936,82.961 204.436,84.461 207.936,84.461 211.436,84.461 211.936,82.961 ; 207.936,82.961 207.936,85.361 ; 199.436,85.061 ccw(c201.036,85.061) 201.036,83.461 214.836,83.461 ccw(c214.836,85.061) 216.436,85.061 216.436,91.721 214.536,91.721 214.536,87.061 cw(c212.836,87.061) 212.836,85.361 203.036,85.361 cw(c203.036,87.061) 201.336,87.061 201.336,91.721 199.436,91.721 199.436,85.061
Mechanical 43:
  circle w0.006: c207.936,96.961 r0.003
  lines w0.013: 201.436,105.993 201.436,110.461 ; 199.436,95.271 201.636,95.271 201.636,87.061 ccw(c203.036,87.061) 203.036,85.661 203.836,85.661 203.836,87.261 205.036,87.261 205.036,85.661 210.836,85.661 210.836,87.261 212.036,87.261 212.036,85.661 212.836,85.661 ccw(c212.836,87.061) 214.236,87.061 214.236,95.271 216.436,95.271 216.436,108.861 ccw(c214.836,108.861) 214.836,110.461 214.036,110.461 214.036,108.661 212.836,108.661 212.836,110.461 203.036,110.461 203.036,108.661 201.836,108.661 201.836,110.461 201.036,110.461 ccw(c201.036,108.861) 199.436,108.861 199.436,95.271 ; 199.636,109.961 ccw(c200.136,109.961) 200.136,109.461 202.736,109.461 ccw(c202.736,109.961) 203.236,109.961 203.236,110.461 199.636,110.461 199.636,109.961
Mechanical 44:
  circle w0.006: c216.436,96.961 r0.003
  lines w0.013: 214.661,95.264 ccw(c216.436,95.271) 216.436,93.496 cw(c216.436,91.721) 218.211,91.729 ; 214.661,103.219 cw(c216.436,103.211) 216.436,104.986 ; 214.661,108.354 ccw(c216.436,108.361) 216.436,106.586 cw(c216.436,104.811) 218.211,104.819 ; 216.436,91.721 216.436,85.061 216.436,108.861 216.436,95.271 ; 216.436,97.887 ccw(c216.436,99.662) 218.211,99.654 ; 216.436,103.211 216.436,104.811
Mechanical 45:
  circle w0.006: c207.936,96.961 r0.003
  lines w0.013: 199.436,95.271 201.636,95.271 201.636,87.061 ccw(c203.036,87.061) 203.036,85.661 203.836,85.661 203.836,87.261 205.036,87.261 205.036,85.661 210.836,85.661 210.836,87.261 212.036,87.261 212.036,85.661 212.836,85.661 ccw(c212.836,87.061) 214.236,87.061 214.236,95.271 216.436,95.271 216.436,99.662 215.636,99.662 215.636,108.361 216.436,108.361 216.436,108.861 ccw(c214.836,108.861) 214.836,110.461 214.036,110.461 214.036,108.661 212.836,108.661 212.836,110.461 203.036,110.461 203.036,108.661 201.836,108.661 201.836,110.461 201.036,110.461 ccw(c201.036,108.861) 199.436,108.861 199.436,95.271
Mechanical 46:
  circle w0.013: c214.436,91.721 r1.05
  circle w0.006: c214.436,96.961 r0.003
  lines w0.013: 212.561,95.263 ccw(c214.436,95.271) 213.419,93.696 ; 214.436,92.853 214.436,91.721 214.436,87.061 ; 214.436,93.396 cw(c214.436,91.721) 216.111,91.729 ; 214.436,94.254 214.436,87.061 ; 214.436,95.271 214.436,87.061 ; 214.436,90.435 214.436,90.84 214.436,90.435 ; 214.436,90.435 214.436,90.746 ; 214.436,90.435 214.436,90.746 ; 214.436,90.746 214.436,91.151 214.436,90.746 ; 214.436,92.697 214.436,92.292 214.436,92.697 ; 214.436,92.697 214.436,93.008 ; 214.436,92.697 214.436,93.008 ; 214.436,93.008 214.436,92.603 214.436,93.008
Mechanical 47:
  circle w0.006: c207.936,109.961 r0.003
  circle w0.006: c207.936,109.961 r0.003
  circle w0.006: c207.936,109.961 r0.003
  lines w0.013: 207.086,109.961 208.786,109.961 ; 207.086,109.961 208.786,109.961 ; 207.086,109.961 208.786,109.961 ; 207.086,109.961 208.786,109.961 ; 207.486,109.961 208.386,109.961 ; 207.486,109.961 208.386,109.961 ; 207.486,109.961 208.386,109.961 ; 207.486,109.961 208.386,109.961 ; 206.636,109.961 209.236,109.961 206.636,109.961
Mechanical 48:
  drawing of 731 lines, arcs and shapes, not listed
Mechanical 49:
  drawing of 798 lines, arcs and shapes, not listed
Mechanical 50:
  circle w0.013: c215.636,103.211 r1.025
  circle w0.006: c215.636,96.961 r0.003
  lines w0.013: 213.761,108.354 ccw(c215.636,108.361) 214.619,106.786 ; 213.961,103.219 cw(c215.636,103.211) 215.636,104.886 ; 215.636,100.679 215.636,107.344 ; 215.636,104.811 215.636,103.211 215.636,105.011 ; 215.636,106.486 cw(c215.636,104.811) 217.311,104.819 ; 216.654,98.087 ccw(c215.636,99.662) 217.511,99.654 ; 215.636,105.011 215.636,105.611 215.636,105.011
Mechanical 51:
  circle w0.013: c203.036,107.461 r0.21
  circle w0.013: c207.936,101.861 r0.22
  circle w0.013: c203.036,101.861 r0.21
  circle w0.013: c207.936,108.081 r0.22
  circle w0.006: c207.936,96.961 r0.003
  lines w0.013: 204.486,110.261 204.486,107.561 207.605,107.561 cw(c207.936,108.061) 207.836,108.653 207.836,110.261 204.486,110.261 ; 204.486,110.261 211.386,110.261 ; 204.486,110.261 204.486,100.611 211.386,100.611 211.386,110.261 ; 211.386,110.261 208.036,110.261 208.036,108.653 cw(c207.936,108.061) 208.268,107.561 211.386,107.561 211.386,110.261
Mechanical 52:
  circle w0.013: c204.286,105.261 r1.25
  circle w0.006: c204.286,96.961 r0.003
  lines w0.013: 204.286,100.611 204.286,110.261 ; 204.286,103.253 204.286,107.361 204.286,103.253
Mechanical 53:
  circle w0.006: c207.836,105.461 r0.003
  circle w0.006: c207.836,96.961 r0.003
  lines w0.013: 207.836,95.271 207.836,108.861 ; 207.836,103.811 207.836,107.111 ; 207.836,103.811 207.836,107.111 ; 207.836,103.811 207.836,107.111 ; 207.836,103.811 207.836,107.111 ; 207.836,102.453 207.836,103.749 207.836,102.453 ; 207.836,104.224 207.836,107.361 207.836,104.224
Mechanical 54:
  drawing of 194 lines, arcs and shapes, not listed